# Altium PCB PCB_CryothermX3.PcbDoc
Units mm, origin at the board's own origin, x right, y up, seen from the top; angles counter-clockwise.
Board outline 69.6 x 49.15 mm, 2 copper layers (Top Layer, Bottom Layer); 20 components, 13 nets, 81 pads, 1 vias.
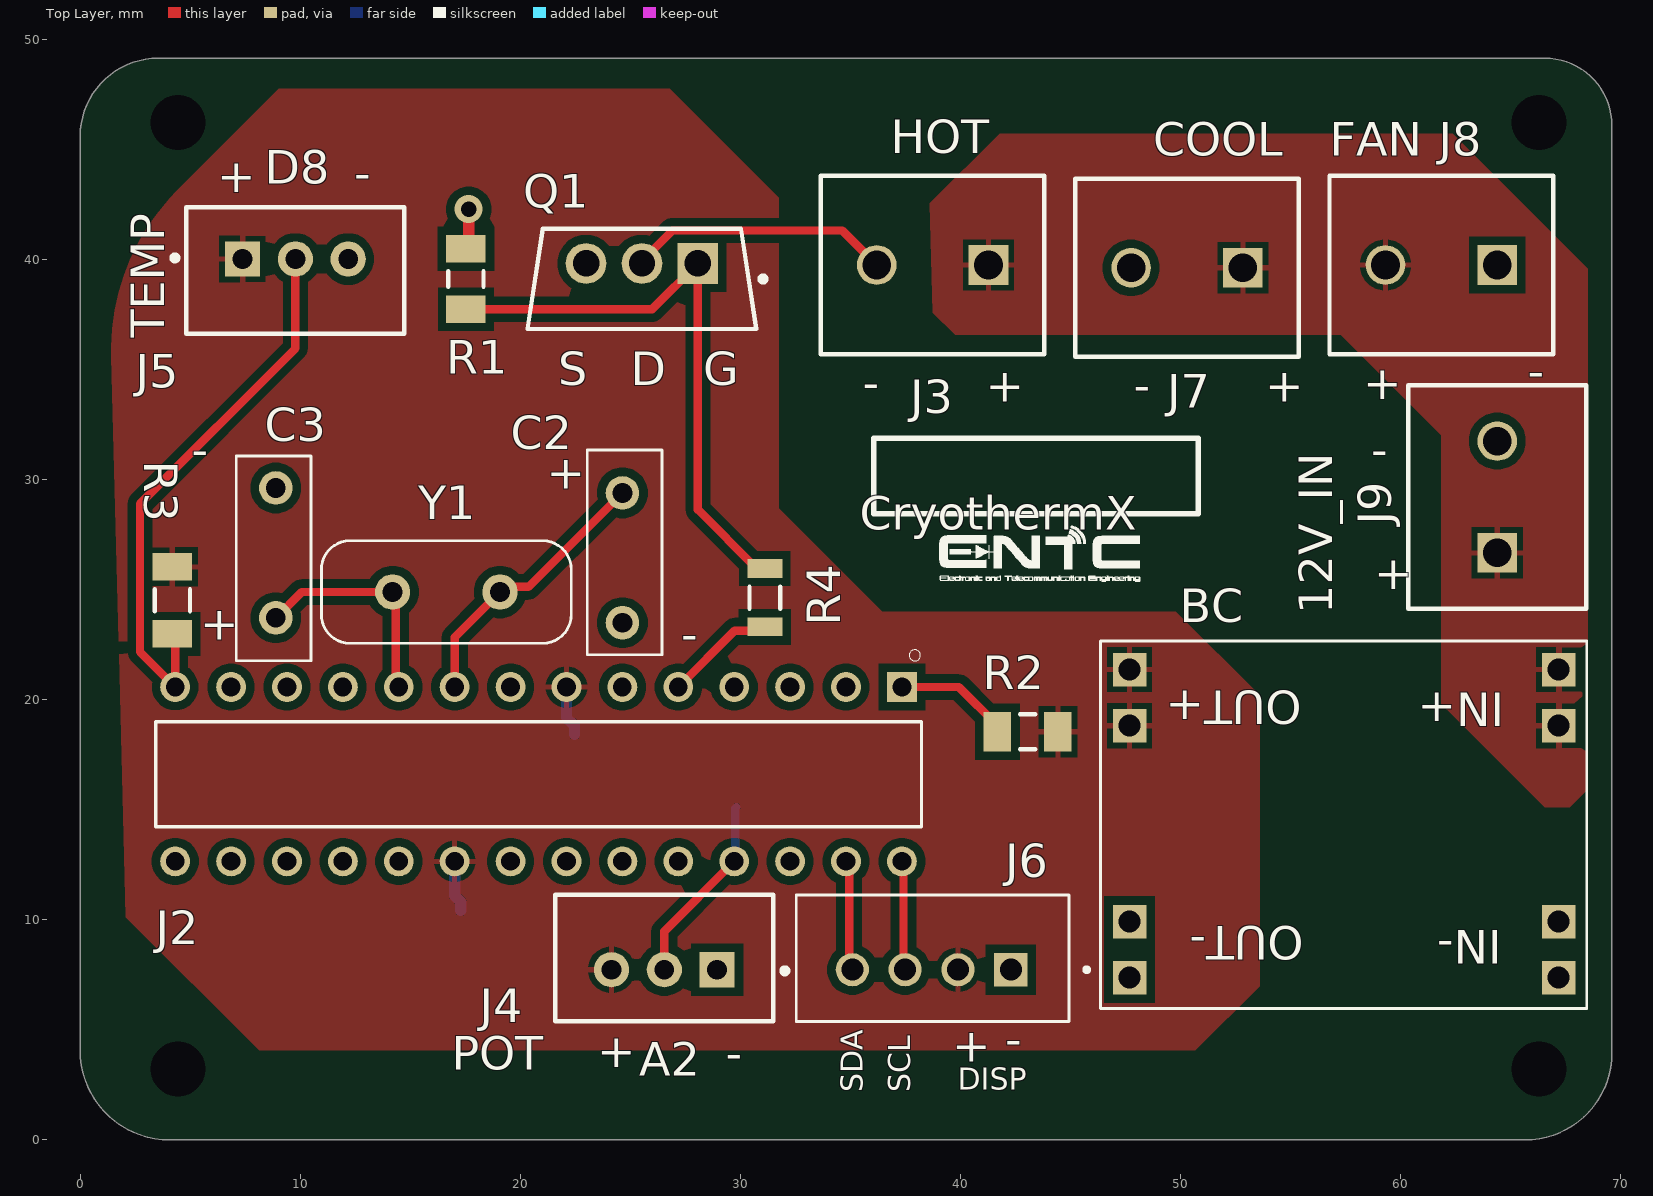
[diagram p0: Top Layer view]
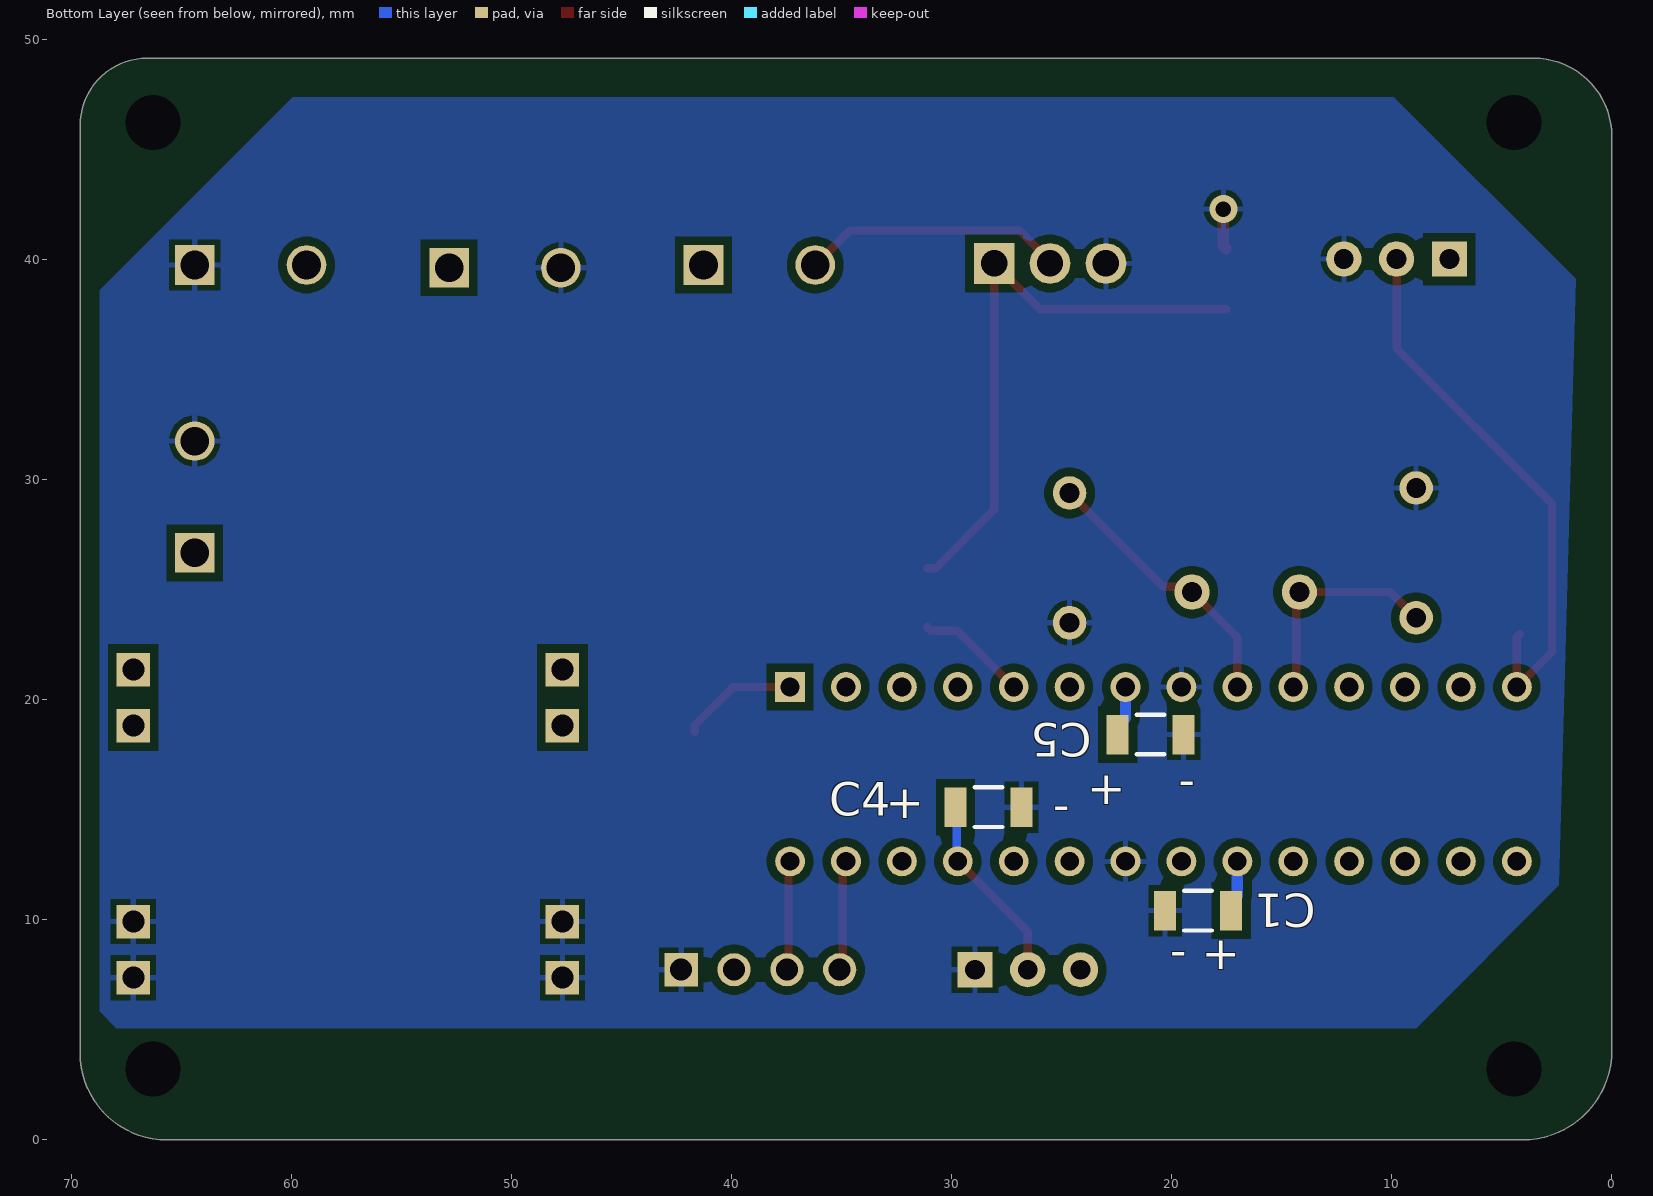
[diagram p1: Bottom Layer view, seen from below]
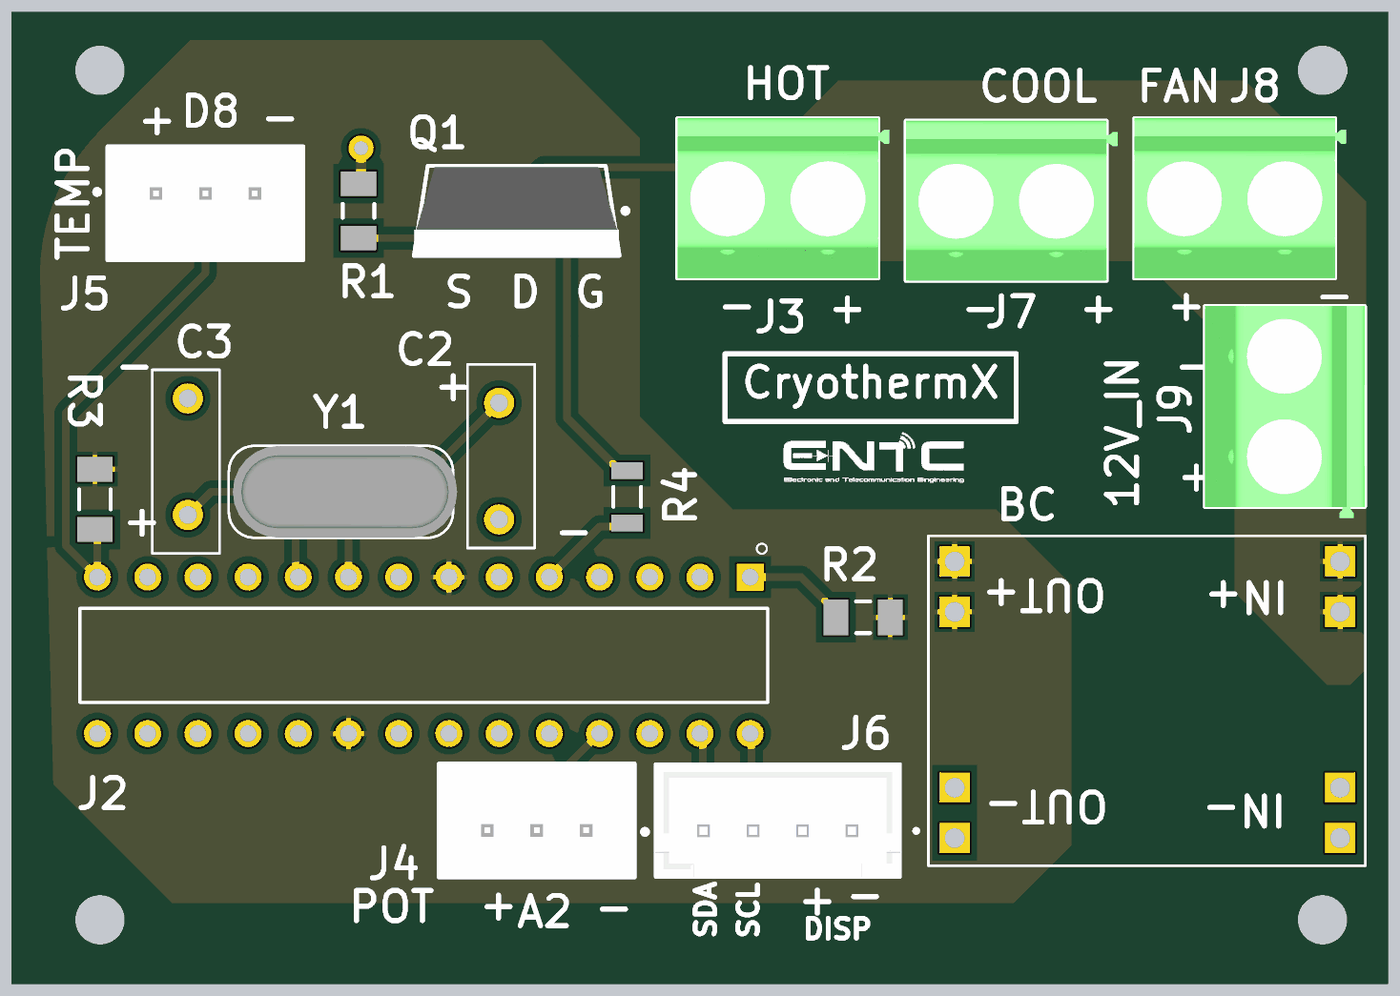
[diagram p2: 3D render of the assembled board from above, using the file's embedded part models]
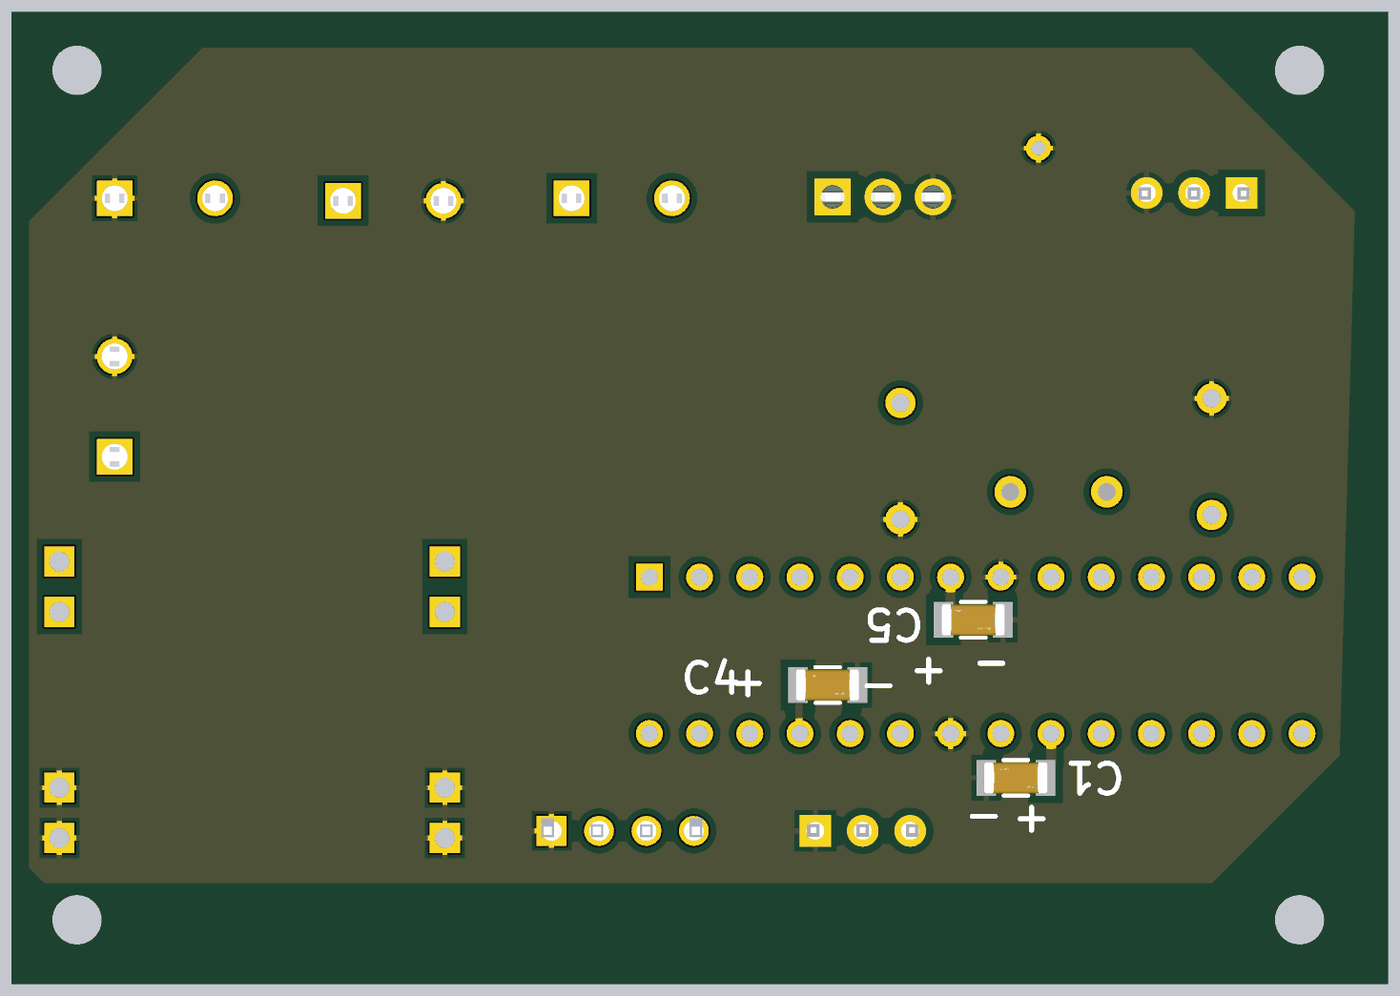
[diagram p3: 3D render of the assembled board from below, using the file's embedded part models]

## Layer stack, top to bottom
Top Solder: solder mask 0.0102, Solder Resist, Dk 3.5
Top Layer: signal copper 0.0356
Dielectric 1: dielectric 0.32, FR-4, Dk 4.8
Bottom Layer: signal copper 0.0356
Bottom Solder: solder mask 0.0102, Solder Resist, Dk 3.5

## Board outline
4.064,0 65.659,0 ccw(c65.659,3.937) 69.596,3.937 69.596,46.101 ccw(c66.548,46.101) 66.548,49.149 3.556,49.149 ccw(c3.556,45.593) 0,45.593 0,4.064 ccw(c4.064,4.064)

## Design rules (kind name [scope] priority, off if disabled: settings)
BoardOutlineClearance [All] p1: gap=0.3 ignorepadtopadclearanceinfootprint=FALSE except(0.4: Arc-SplitBarrior Arc-SplitContinuation Track-SplitBarrior Track-SplitContinuation SMDPad-SplitBarrior SMDPad-SplitContinuation THPad-SplitBarrior THPad-SplitContinuation Via-SplitBarrior Via-SplitContinuation Fill-SplitBarrior Fill-SplitContinuation Poly-SplitBarrior Poly-SplitContinuation Region-SplitBarrior Region-SplitContinuation Text-SplitBarrior Text-SplitContinuation)
Clearance "Clearance Different Nets" [All] p1: gap=0.2 ignorepadtopadclearanceinfootprint=FALSE except(0.089: Arc-Arc Arc-Track Arc-SMDPad Track-Track Track-SMDPad; 0.127: SMDPad-SMDPad SMDPad-Via THPad-Via Via-Via; 0.254: Arc-Via Arc-Text Track-Via Track-Text SMDPad-Text THPad-Text Via-Text Fill-Text Poly-Text Region-Text Text-Text; 0.5: THPad-THPad Via-Hole)
Clearance "Clearance Same Nets" [All] p2: gap=0.2 ignorepadtopadclearanceinfootprint=FALSE except(0.089: Arc-Arc Arc-Track Arc-SMDPad Track-Track Track-SMDPad SMDPad-SMDPad; 0.127: SMDPad-Via THPad-Via; 0.254: Arc-Via Arc-Text Track-Via Track-Text SMDPad-Text THPad-Text Via-Via Via-Text Fill-Text Poly-Text Region-Text Text-Text)
Clearance "Clearance Bottom Layer" [OnLayer('Bottom Layer')] p3: gap=0.203 ignorepadtopadclearanceinfootprint=TRUE except(0.254: Arc-Text Track-Text SMDPad-Text THPad-Text Via-Text Fill-Text Poly-Text Region-Text Text-Text)
Clearance "Clearance Top Layer" [OnLayer('Top Layer')] p4: gap=0.203 ignorepadtopadclearanceinfootprint=TRUE except(0.254: Arc-Text Track-Text SMDPad-Text THPad-Text Via-Text Fill-Text Poly-Text Region-Text Text-Text)
HoleSize [All] p1: absolutevalues=TRUE maxlimit=6.3 minlimit=0.2 maxpercent=80.000 minpercent=20.000
MinimumAnnularRing [All] p1: minimumring=0.13
MinimumSolderMaskSliver [All] p1: minsoldermaskwidth=0.1
PolygonConnect PolygonConnect_1 [All] p1: thpad.connectstyle=Relief thpad.reliefconductorwidth=0.508 thpad.reliefentries=4 thpad.polygonreliefangle="90 Angle" thpad.airgapwidth=0.254 smdpad.connectstyle=Relief smdpad.reliefconductorwidth=0.508 smdpad.reliefentries=4 smdpad.polygonreliefangle="90 Angle" smdpad.airgapwidth=0.254 via.connectstyle=Direct via.reliefconductorwidth=0.508 via.reliefentries=4 via.polygonreliefangle="90 Angle" via.airgapwidth=0.254
RoutingCorners [All] p1: cornerstyle=Round minsetback=2.54 maxsetback=2.54
RoutingVias [All] p1: holewidth=0.5 width=1 viastyle="Through Hole" minholewidth=0.2 minwidth=0.35 maxholewidth=1 maxwidth=2
SilkToSilkClearance [All] p1: silktosilkclearance=0.1
SilkToSolderMaskClearance [IsPad] p1: minsilkscreentomaskgap=0.1 clearancetoexposedcopper=TRUE
SolderMaskExpansion [All] p1: expansion=0.102 istentingtop=FALSE
Width [All] p1: maxlimit=2.54 minlimit=0.089 preferedwidth=0.381
25 further rules are at their usual default settings.

## Components (designator, comment, footprint, x,y, rotation, side; value= is the part's Value field where it differs from the comment)
BC "buck convertter" BUCK_CONVERTER 57.558,14.366 r180 top (schematic designator BUCK_CONVERT)
C1 "100 nF" FP-CC1206-1_25-MFG 18.796,10.414 r0 bottom
C2 "22pF" PCBComponent_1 24.638,26.445 r90 top
C3 "22pF" PCBComponent_1 8.89,26.67 r270 top
C4 "100 nF" FP-CC1206-1_25-MFG 28.321,15.113 r180 bottom
C5 "100 nF" FP-CC1206-1_25-MFG 20.955,18.415 r180 bottom
J2 "110-41-628-41-001000" DIP794W46P254L2967H457Q28B 20.828,16.614 r270 top
J3 "1729128" PHOE-1729128-2_V 38.735,39.751 r180 top
J4 "B3B-XH-A(LF)(SN)" FP-B3B-XH-A_LF_SN-MFG 26.543,8.255 r180 top
J5 "B3B-XH-A(LF)(SN)" FP-B3B-XH-A_LF_SN-MFG 9.779,39.497 r0 top
J6 "B4B-XH-A(LF)(SN)" JST_B4B-XH-A(LF)(SN) 38.735,8.255 r0 top
J7 "1729128" PHOE-1729128-2_V 50.292,39.624 r180 top
J8 "1729128" PHOE-1729128-2_V 61.849,39.751 r180 top
J9 "1729128" PHOE-1729128-2_V 64.389,29.21 r90 top
Q1 "IRLZ44NPbF" FP-PG-TO220-3-MFG 25.527,39.116 r270 top
R1 "CRCW120610K0FKEAHP" RESC3116X65X50NL20T20 17.526,39.116 r90 top
R2 "CRCW120610K0FKEAHP" RESC3116X65X50NL20T20 43.053,18.542 r0 top
R3 "RC1206FR-074K87L" RESC3116X65X40ML10T20 4.191,24.511 r90 top
R4 "RC1206FR-07221RL" RESC3116X65X40LL10T20 31.115,24.638 r90 top
Y1 "ECS-160-20-4X" XTAL_ECS-160-20-4X 16.637,24.892 r0 top

## Footprints (in the part's own frame and the unit in brackets; to place one, negate y for a bottom-side part, rotate by r counter-clockwise, add the part's x,y. Pads: shape width x height; smd on the part's side, far side on the other; paste and mask are expansions set on the pad)
BUCK_CONVERTER [mm]
  rect 1.524x1.524 hole 1: 1(-9.625,7) 2(-9.625,4.45) 3(-9.625,-4.45) 4(-9.625,-7) 5(9.875,-7) 6(9.875,-4.45) 7(9.875,4.45) 8(9.875,7)
  silkscreen extent -10.9,-8.3 11.2,8.4, body extent -9.23,-7.6 9.23,7.7, height 5
DIP794W46P254L2967H457Q28B [mm]
  rect 1.358x1.358 hole 0.85: 1(-3.96,16.51)
  round 1.358 hole 0.85: 2(-3.96,13.97) 3(-3.96,11.43) 4(-3.96,8.89) 5(-3.96,6.35) 6(-3.96,3.81) 7(-3.96,1.27) 8(-3.96,-1.27) 9(-3.96,-3.81) 10(-3.96,-6.35) 11(-3.96,-8.89) 12(-3.96,-11.43) 13(-3.96,-13.97) 14(-3.96,-16.51) 15(3.96,-16.51) 16(3.96,-13.97) 17(3.96,-11.43) 18(3.96,-8.89) 19(3.96,-6.35) 20(3.96,-3.81) 21(3.96,-1.27) 22(3.96,1.27) 23(3.96,3.81) 24(3.96,6.35) 25(3.96,8.89) 26(3.96,11.43) 27(3.96,13.97) 28(3.96,16.51)
  silkscreen extent -5.65,-17.4 2.38,17.4
FP-B3B-XH-A_LF_SN-MFG [mm]
  rect 1.6x1.6 hole 0.9 paste-2539.97 mask+0: 1(-2.4,0.525)
  round 1.6 hole 0.9 paste-2539.97 mask+0: 2(0,0.525) 3(2.4,0.525)
  silkscreen extent -5.6,-2.88 4.95,2.88, body extent -5.05,-2.98 5.05,2.98, height 0.25
FP-CC1206-1_25-MFG [mm]
  rect 1x1.8 smd paste+0 mask+0: 1(-1.5,0) 2(1.5,0)
  silkscreen extent -0.63,-0.9 0.63,0.9, body extent -1.6,-0.8 1.6,0.8, height 1.45
FP-PG-TO220-3-MFG [mm]
  rect 1.85x1.85 hole 1.2 paste-2539.97 mask+0: 1(-0.705,2.54)
  round 1.85 hole 1.2 paste-2539.97 mask+0: 2(-0.705,0) 3(-0.705,-2.54)
  silkscreen extent -2.27,-5.2 2.27,5.63, body extent -2.37,-5.55 2.37,5.55, height 0.25
JST_B4B-XH-A(LF)(SN) [mm]
  rect 1.508x1.508 / inner round 1.508 / far side rect 1.508x1.508 hole 1: 1(3.55,-0.525)
  round 1.508 hole 1: 2(1.15,-0.525) 3(-1.25,-0.525) 4(-3.65,-0.525)
  silkscreen extent -6.2,-2.88 7.1,2.88, body extent -6.2,-2.88 6.2,2.88, height 7
PCBComponent_1 [mm]
  round 1.524 hole 0.9: 1(-2.95,0) 2(2.95,0)
  silkscreen extent -4.4,-1.8 4.9,1.6, body extent -3.25,-3 3.25,3, height 18
PHOE-1729128-2_V [mm] "Receptacle, 2-Leads, Body 8.1x10.16mm, Pitch 5.08mm"
  rect 1.8x1.8 hole 1.3: 1(-2.54,0)
  round 1.8 hole 1.3: 2(2.54,0)
  silkscreen extent -5.08,-4.05 5.08,4.05, body extent -5.65,-4.05 5.08,4.05, height 10.01
RESC3116X65X40LL10T20 [mm] "Chip Resistor, 2-Leads, Body 3.10x1.60mm, IPC High Density"
  rect 0.85x1.6 smd: 1(-1.325,0) 2(1.325,0)
  silkscreen extent -0.5,-0.7 0.5,0.7, body extent -1.6,-0.85 1.6,0.85, height 0.65
RESC3116X65X40ML10T20 [mm] "Chip Resistor, 2-Leads, Body 3.10x1.60mm, IPC Low Density"
  rect 1.25x1.8 smd: 1(-1.525,0) 2(1.525,0)
  silkscreen extent -0.5,-0.8 0.5,0.8, body extent -1.6,-0.85 1.6,0.85, height 0.65
RESC3116X65X50NL20T20 [mm] "Chip Resistor, 2-Leads, Body 3.10x1.60mm, IPC Medium Density"
  rect 1.25x1.8 smd: 1(-1.375,0) 2(1.375,0)
  silkscreen extent -0.35,-0.8 0.35,0.8, body extent -1.65,-0.9 1.65,0.9, height 0.65
XTAL_ECS-160-20-4X [mm]
  round 1.6 hole 0.9: 1(-2.44,0) 2(2.44,0)
  silkscreen extent -5.68,-2.33 5.68,2.33, body extent -5.47,-2.32 5.88,2.32, height 3.5

## Part data
C1 C4 C5: library part CMP-03422-000842-1, "CAP CER 0.1UF 50V X7R 1206", Manufacturer=Yageo, Manufacturer Part Number=CC1206KRX7R9BB104, Package=CC1206-1.25, Temperature="-55°C to +125°C", Temperature Characteristic=X7R, Temperature Coefficient=15%, Temperature Range High=+125°C, Temperature Range Low=-55°C, Tolerance=0.1, Voltage Rating="50 V", Automotive=No, Automotive Grade=NA, Capacitance="100 nF", Category=Cap, ComponentLink2Description=Datasheet, ComponentLink2URL=http://www.yageo.com/documents/recent/UPY-NP0X7R_HV_1KV-to-3KV_11.pdf, Device Class L1="Passive Components", Device Class L2=Capacitors, Device Class L3="Ceramic Capacitors", Digikey Description="CAP CER 0.1UF 50V X7R 1206", Footprint Url=http://www.yageo.com/exep/pages/download/literatures/UPY-C_GEN_24.pdf, Height=1.45mm, Lead Free=Yes, Material=Ceramic, Mouser Description="Multilayer Ceramic Capacitors MLCC - SMD/SMT 100nF 50V X7R 10%", Octopart=https://octopart.com/cc1206krx7r9bb104-yageo-39467816, RoHS=TRUE
C2 C3: library part CD15ED220JO3F, "Mica Capacitor, Mica, 500V, 5% +Tol, 5% -Tol, -20/+100ppm/Cel TC, 0.000022uF, Through Hole Mount", Capacitor Type=Mica, Case/Package=4517, Manufacturer="Cornell Dubilier", Max Operating Temperature=125°C, Min Operating Temperature=-55°C, Package Shape=Rectangular, Package Style=RadialMeter, Rated DC Voltage (URdc)=500V, Supplier Part Number=338-2602-ND, Tolerance  (fill in as +-)=5%, Category="Mica Capacitors", ComponentLink1Description=https://datasheet.ciiva.com:443/pdfs/VipMasterIC/IC/CDUB/CDUB-S-A0009903856/CDUB-S-A0009903856-1.pdf?src-supplier=IHS+Markit, ComponentLink1URL=https://datasheet.ciiva.com:443/pdfs/VipMasterIC/IC/CDUB/CDUB-S-A0009903856/CDUB-S-A0009903856-1.pdf?src-supplier=IHS+Markit, ComponentLink2Description=https://datasheet.ciiva.com/254/cd10-254791.pdf?src-supplier=Digikey, ComponentLink2URL=https://datasheet.ciiva.com/254/cd10-254791.pdf?src-supplier=Digikey, ComponentLink3Description=https://datasheet.ciiva.com/15914/407std-dipped-15914297.pdf?src-supplier=Onlinecomponents.com, ComponentLink3URL=https://datasheet.ciiva.com/15914/407std-dipped-15914297.pdf?src-supplier=Onlinecomponents.com, ComponentLink4Description=https://datasheet.ciiva.com/1459/87234-1459678.pdf?src-supplier=Element14, ComponentLink4URL=https://datasheet.ciiva.com/1459/87234-1459678.pdf?src-supplier=Element14, ComponentLink5Description=https://datasheet.ciiva.com/14591/70189459-14591579.pdf?src-supplier=Allied+Electronics, ComponentLink5URL=https://datasheet.ciiva.com/14591/70189459-14591579.pdf?src-supplier=Allied+Electronics, ComponentLink6Description=https://datasheet.ciiva.com/16294/std-dipped-16294766.pdf?src-supplier=Future+Electronics, ComponentLink6URL=https://datasheet.ciiva.com/16294/std-dipped-16294766.pdf?src-supplier=Future+Electronics, ComponentLink7Description=https://datasheet.ciiva.com/15164/getdatasheetpartid-61690-15164378.pdf?src-supplier=Verical, ComponentLink7URL=https://datasheet.ciiva.com/15164/getdatasheetpartid-61690-15164378.pdf?src-supplier=Verical, Dielectric Material=Mica, Height=9.1mm, JESD-609 Code=e3, Length=11.4mm, Manufacturer Part Number=CD15ED220JO3F, Mounting Technology="Through Hole", Packaging="Tape and Reel", Pins=2, Pricing="1=3.21, 10=2.244, 50=1.861, 100=1.7425, 500=1.54216, 1000=1.4801, 2500=1.41456, 5000=1.37502 (USD)", Reach SVHC Compliant=Yes, RoHS=Yes, RoHS Compliant=Yes, Stock=1576, Supplier=Digikey, Terminal Finish=Nickel, Terminal Pitch=5.9mm, Termination=Wire, Tolerance (fill in as +-)=5%, Width=4.3mm
J2: "28 (2 x 14) Pos DIP, 0.6 (15.24mm) Row Spacing Socket Gold Through Hole", Package=None, Availability=Good, Check_prices=https://www.snapeda.com/parts/110-41-628-41-001000/Mill-Max%20Manufacturing%20Corp./view-part/1297615/?ref=eda, MF=Mill-Max, MP=110-41-628-41-001000, Price=None, Purchase-URL=https://pricing.snapeda.com/search/part/110-41-628-41-001000/?ref=eda, SnapEDA_Link=https://www.snapeda.com/parts/110-41-628-41-001000/Mill-Max%20Manufacturing%20Corp./view-part/1297615/?ref=snap
J3 J7 J8 J9: library part CMP-2000-05815-1, "PCB Terminal Block, 13.5 A, 400 V, 2-Pin THD, RoHS, Bulk", Current Rating=13500mA, Manufacturer="Phoenix Contact", Package Description="2-Pin Through Hole Device, Body 8.1 x 10.16 mm, Pitch 5.08 mm", Package Reference=1729128-2, Package Version=03/2015, Voltage Rating=400V, Datasheet URL=https://datasheet.ciiva.com/16046/1729128-16046181.pdf, Datasheet Version=12/2013, Manufacturer URL=http://www.phoenixcontact.com/, Mounting Technology=ThroughHole, No. of Positions=2, No. of Rows=1, Orientation=Horizontal, Package URL=https://www.phoenixcontact.com/online/portal/pi/pxc/product_detail_page/!ut/p/b1/3VdJjqNKFDxLH8AFycySyWY2ozFsEPOMMQaDOX1XedGL_1Vdm5YXJleknhSKeBkvI6EA8ncAo3AYoDhBQGco6KN7VURTdemj9us_IEKEZo_YHiPAEWEFmDGOHMORkqKYCORBZxgL7ZoaZYcbFFUZ3fqxSY6GOuxydWUuHqz1ynmMFygu583Bob0Ewr6Sd_l-5m-kAueHiB0jpRwZwe58wwtkpxtMYd_LmGcDRU02dRNEyWt6Y2ti5pSyJ_reIkzIulrqApdnbT11V5jnCKbYNCvhEM1MCpPByat_X379-iThf08CI5GfOPqfBeS3BRoBOdD55AKVv0iLwCMq-2BrzXWSGRH7pUGD9uwXQjiph3xL0DKQwdGa0JImiIOmBNOestqgwTHSSs2oOep-78apyXQBvNi8ZLaFjvjWvcaUEBu0MC6Wbe-d6mB0FAebo2lUWinqYaZs5DAYzV0RP9yitUjnGJ0iI9xhZkT42OCQNUJJhkgWINNQLP2JFP6OpMg3JCVg70jqHT0lvKOnhHf0lPuOnnLf0VPuWx6_dxwUIvwk5WMkT0kLL1mh61l2yZVSzG3pYV_bqo-mj6uMKwKwdnnW8Jh5RTOJzMOA5c-eJDaZQw4mTMPH02PvS_ZAqNVjVTo2WyYLkwH_KU1mmmG5kjRhDqPXLwwVHvVOjCM60-fpXvTDfMGW1PVFVS1r4e4yVDk4ZdNbkUHvqPqQSeian4UD39fNKmachqdJ1NJbyk8rXT9mXTvPk3oE5meulKGgiruPJek-4I9hTT6G8ZLOyRSm2RRVbThERQad5OS28hdt4YW4vG0stgYYzsWsK4_7y6DZMjJSCqri1kyiZR5vD7pwIrNR7QwPHTcLTI5qT7eRlpHrdGiupYlqQDJ7zy_CND8fWWBoLRXxk1RVcXiBQwbTD4Xi7KL-FuO94t9xaqweXzH, Packing=Bulk, PartNumber=1729128, Pitch=5.08mm, RoHS=TRUE
J4 J5: library part CMP-17439-000014-3, "CONN HEADER VERT 3POS 2.5MM", Color=Natural, Contact Resistance=20mR, Current Rating=3A, Flammability Rating="UL94 V-0", Housing Color=White, Insulation Resistance=1GR, Max Operating Temperature=85°C, Max Voltage Rating (AC)=250V, Min Operating Temperature=-25°C, Connector Type=Header, Contact Finish - Mating=TIN, Contact Material=Brass, Contact Plating=Tin, Contact Shape=Square, Contact Type="Male Pin", Depth=5.75mm, Fastening Type=Detent, Gender=Male, Housing Material=Polyamide, Insulation Color=Natural, Insulation Material=Nylon, Lead Free="Lead Free", Lead Pitch=2.5mm, Length=9.9mm, Max Current Rating=3A, Max Voltage Rating (DC)=250V, Mount="Through Hole", Number of Contacts=3, Number of Positions=3, Number of Rows=1, Orientation=Straight, Packaging=Bulk, Pitch=2.5mm, REACH SVHC="No SVHC", Series=XH, Termination=Solder, Voltage Rating=250V, Voltage Rating (AC)=250V, Wire/Cable Gauge=22AWG
J6: "Connector Header Through Hole 4 position 0.098 (2.50mm)", Package=None, Check_prices=https://www.snapeda.com/parts/B4B-XH-A(LF)(SN)/JST+Sales+America+Inc./view-part/?ref=eda, MF="JST Sales", MP=B4B-XH-A(LF)(SN), SnapEDA_Link=https://www.snapeda.com/parts/B4B-XH-A(LF)(SN)/JST+Sales+America+Inc./view-part/?ref=snap
Q1: library part CMP-32901-000488-1, "MOSFET N-CH 55V 47A TO220AB", Case/Package=TO-220, Continuous Drain Current (ID)=47A, Drain to Source Breakdown Voltage=55V, Drain to Source Resistance=35mR, Gate to Source Voltage (Vgs)=16V, Input Capacitance=1.7nF, Max Operating Temperature=175°C, Max Power Dissipation=110W, Min Operating Temperature=-55°C, Threshold Voltage=2V, Drain to Source Voltage (Vdss)=55V, Element Configuration=Single, Halogen Free="Halogen Free", Height=0.6inch, Lead Free="Lead Free", Length=0.414inch, Max Dual Supply Voltage=55V, Mount="Through Hole", Number of Pins=3, Packaging=Rail/Tube, Power Dissipation=110W, Rds On Max=22mR, REACH SVHC="No SVHC", RoHS Compliant=Yes, Turn-Off Delay Time=26ns, Turn-On Delay Time=11ns, Width=0.185inch
R1 R2: library part CMP-2003-04883-1, "10KOhm R -CRCW120610K0FKEAHP", Manufacturer="Vishay Dale", Part Number=CRCW120610K0FKEAHP
R3: library part CMP-2003-03785-1, Manufacturer=Yageo, Part Number=RC1206FR-074K87L
R4: library part CMP-2003-03622-1, Manufacturer=Yageo, Part Number=RC1206FR-07221RL
Y1: "16 MHz Â±30ppm Crystal 20pF 40 Ohms HC-49/US", Package="HC-49USX-4X-2 ECS", Check_prices=https://www.snapeda.com/parts/ECS-160-20-4X/ECS/view-part/?ref=eda, MF="ECS Inc.", MP=ECS-160-20-4X, SnapEDA_Link=https://www.snapeda.com/parts/ECS-160-20-4X/ECS/view-part/?ref=snap

## Free pads (board coordinates)
  round 1.524 hole 2.5 unplated: 5(4.445,3.228) 5(4.445,46.228) 5(66.294,3.228) 5(66.294,46.228)

## Via types
v1: diameter 1.27, hole 0.711, Top Layer to Bottom Layer, 1 vias

## Nets (pads, with @x,y where several pads share a name; then routed paths per layer and width w, separated by ;. In a path a pad name is that pad's centre, name@x,y a point inside that pad or via, vN(x,y) a via of type N, cw(c..) or ccw(c..) an arc to the next point about the centre after c; other vN are vias at no path point)
A2: C4.1 J2.25 J4.2 | length 8.7
  Top Layer w0.381: J4.2 26.543,9.479 J2.25
  Bottom Layer w0.381: J2.25 29.769,12.705 29.769,15.061 C4.1
D3: J2.5 R4.1 | length 5.1
  Top Layer w0.381: J2.5 29.743,23.139 30.942,23.139 R4.1
GND: BC.1 BC.2 BC.7 BC.8 C1.2 C2.1 C3.1 C4.2 C5.2 J2.8 J2.22 J4.1 J5.3 J6.1 J7.2 J8.1 J9.2 Q1.3 R1.2 | length 1.9
  Top Layer w0.508: R1.2 17.653,40.618 v1(17.653,42.291)
NetC2_2: C2.2 J2.9 Y1.2 | length 12.6
  Top Layer w0.381: J2.9 17.018,22.833 Y1.2 19.31,25.125 20.368,25.125 C2.2
NetC3_2: C3.2 J2.10 Y1.1 | length 10.2
  Top Layer w0.381: C3.2 8.898,23.72 10.07,24.892 Y1.1 14.337,24.751 14.337,20.715 J2.10
NetJ2_1: J2.1 R2.1 | length 5.3
  Top Layer w0.381: J2.1 39.921,20.574 41.678,18.817 R2.1
NetJ2_14: J2.14 J5.2 R3.1 | length 25.5
  Top Layer w0.381: R3.1 4.318,22.859 J2.14 2.719,22.173 2.719,28.903 9.779,35.963 J5.2
NetJ3_2: J3.2 Q1.2 | length 12
  Top Layer w0.381: Q1.2 25.527,39.939 26.905,41.317 34.629,41.317 J3.2
NetQ1_1: Q1.1 R1.1 R4.2 | length 26.7
  Top Layer w0.381: R1.1 25.987,37.741 Q1.1 28.067,28.636 30.74,25.963 R4.2
PWR_12V_PELH: BC.3 BC.4 J3.1 J7.1 J8.2 J9.1
SCL: J2.28 J6.3 | length 5
  Top Layer w0.381: J2.28 37.411,12.581 37.411,7.803 J6.3
SDA: J2.27 J6.4 | length 5
  Top Layer w0.381: J2.27 34.941,12.511 34.941,7.873 J6.4
VOLTS_5: BC.5 BC.6 C1.1 C5.1 J2.7 J2.20 J4.3 J5.1 J6.2 R2.2 R3.2 | length 4.7
  Bottom Layer w0.508: J2.20 17.018,11.092 17.296,10.814 C1.1 ; J2.7 22.098,19.172 22.455,18.815 C5.1
pads on no net: J2.2 J2.3 J2.4 J2.6 J2.11 J2.12 J2.13 J2.15 J2.16 J2.17 J2.18 J2.19 J2.21 J2.23 J2.24 J2.26

## Polygon pours and split planes (outlines as drawn)
VOLTS_5 on Top Layer "VOLTS_5_L01_P003" (solid, remove dead copper, pour order 3): 4.566,43.301 9.017,47.752 26.797,47.752 31.75,42.799 31.75,28.702 36.449,24.003 49.784,24.003 53.594,20.193 53.594,6.985 50.673,4.064 8.128,4.064 2.082,10.11 1.419,35.616 cw(c11.657,35.882) 3.347,41.867 cw(c12.832,35.035)
PWR_12V_PELH on Top Layer "PWR_12V_PELH_L01_P001" (solid, remove dead copper, pour order 1): 38.608,42.545 41.783,45.72 62.357,45.72 68.5,39.577 68.5,15.922 67.691,15.113 66.548,15.113 61.849,19.812 61.849,32.004 57.277,36.576 39.751,36.576 38.735,37.592
GND on Bottom Layer "GND_L02_P004" (solid, remove dead copper, pour order 4): 1.651,39.116 9.906,47.371 59.944,47.371 68.707,38.608 68.707,5.842 67.945,5.08 8.89,5.08 2.413,11.557

## Silkscreen, mask and mechanical layers (free items; w line width, h text height)
Top Overlay:
  drawing of 44 lines, arcs and shapes, not listed
  text "HOT" at 36.83,44.831 h1.52
  text "COOL" at 48.768,44.704 h1.52
  text "FAN" at 56.769,44.704 h1.52
  text "D8" at 8.382,43.434 h1.52
  text "-" at 12.446,43.18 h1.52
  text "+" at 6.223,43.053 h1.52
  text "TEMP" at 3.81,36.449 h1.52 r90
  text "S" at 21.717,34.29 h1.52
  text "D" at 25.019,34.29 h1.52
  text "G" at 28.321,34.29 h1.52
  text "-" at 65.786,34.163 h1.52
  text "-" at 35.56,33.655 h1.52
  text "+" at 58.293,33.655 h1.52
  text "+" at 41.148,33.528 h1.52
  text "-" at 47.879,33.528 h1.52
  text "+" at 53.848,33.528 h1.52
  text "-" at 5.08,30.607 h1.52
  text "-" at 58.674,30.607 h1.52
  text "+" at 21.209,29.591 h1.52
  text "CryothermX" at 35.421,27.718 h1.52
  text "+" at 58.801,25.019 h1.52
  text "12V_IN" at 56.896,23.876 h1.52 r90
  text "+" at 5.461,22.733 h1.52
  text "-" at 27.305,22.225 h1.52
  text "-" at 42.037,3.81 h1.52
  text "+" at 39.624,3.556 h1.52
  text "+" at 23.495,3.302 h1.52
  text "POT" at 16.891,3.175 h1.52
  text "-" at 29.337,3.175 h1.52
  text "A2" at 25.4,2.921 h1.52
  text "DISP" at 39.878,2.286 h1
  text "SDA" at 35.56,2.159 h1 r90
  text "SCL" at 37.719,2.159 h1 r90
Bottom Overlay:
  text "-" at 18.923,15.621 h1.52
  text "+" at 22.098,15.24 h1.52
  text "+" at 31.242,14.605 h1.52
  text "-" at 24.638,14.478 h1.52
  text "-" at 19.304,7.874 h1.52
  text "+" at 16.891,7.747 h1.52
Mechanical 1:
  lines w0.5: 0.5,3.5 ccw(c2.914,3.5) 1.207,1.793 1.75,1.25 ccw(c3.561,3.061) 3.561,0.5 4.25,0.5 65.98,0.5 ccw(c65.98,3.566) 68.148,1.398 68.352,1.602 ccw(c66.184,3.77) 69.25,3.77 69.25,46.399 ccw(c67.195,46.399) 68.648,47.852 ccw(c66.48,45.684) 66.48,48.75 6.75,48.75 3.52,48.75 ccw(c3.52,45.684) 1.352,47.852 1.207,47.707 ccw(c2.914,46) 0.5,46 0.5,3.5

## Text inside footprints (layer, text, board x,y; h text height)
BC: Top Overlay "IN-" at 64.604,9.512 h1.52 r180; Top Overlay "IN+" at 64.704,20.312 h1.52 r180; Top Overlay "OUT-" at 55.604,9.712 h1.52 r180; Top Overlay "OUT+" at 55.504,20.412 h1.52 r180